# Altium PCB ButtonBoard.PcbDoc
Units mm, origin at the board's own origin, x right, y up, seen from the top; angles counter-clockwise.
Board outline 76 x 18 mm, 2 copper layers (Top Layer, Bottom Layer); 21 components, 24 nets, 84 pads, 47 vias.
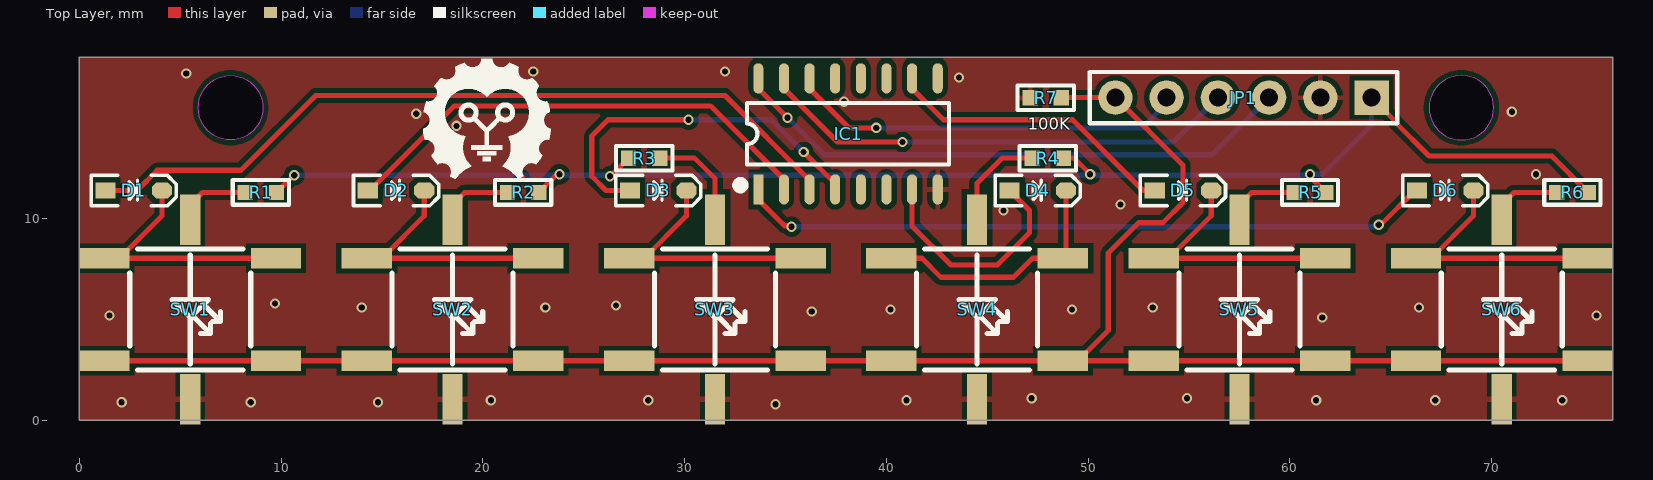
[diagram p0: Top Layer view]
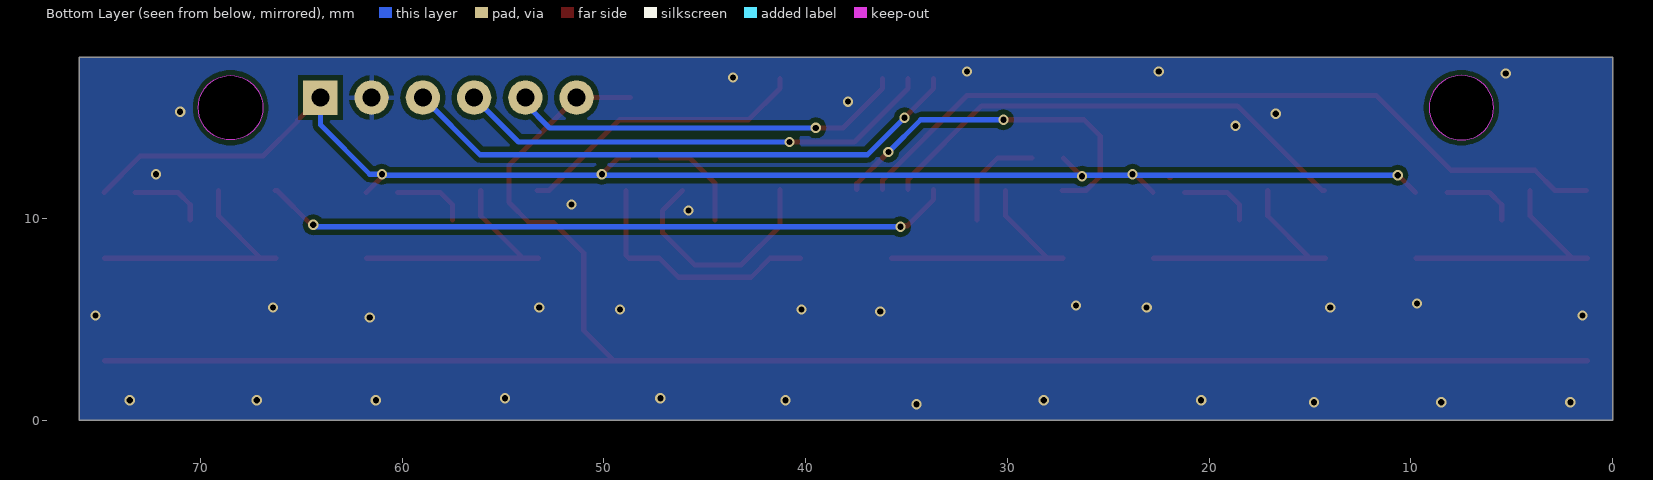
[diagram p1: Bottom Layer view, seen from below]

## Layer stack, top to bottom
Top Solder: solder mask 0.0102, Solder Resist, Dk 3.5
Top Layer: signal copper 0.0356
Dielectric 1: dielectric 0.32, FR-4, Dk 4.8
Bottom Layer: signal copper 0.0356
Bottom Solder: solder mask 0.0102, Solder Resist, Dk 3.5

## Board outline
0,0 76,0 76,18 0,18
cut-out: 66.9,15.5 ccw(c68.5,15.5) 68.5,13.9 ccw(c68.5,15.5) 70.1,15.5 ccw(c68.5,15.5) 68.5,17.1 ccw(c68.5,15.5)
cut-out: 7.5,13.9 cw(c7.5,15.5) 5.9,15.5 cw(c7.5,15.5) 7.5,17.1 cw(c7.5,15.5) 9.1,15.5 cw(c7.5,15.5)

## Design rules (kind name [scope] priority, off if disabled: settings)
Clearance [All] p1: gap=0.254 ignorepadtopadclearanceinfootprint=FALSE except(0: Arc-Hole Track-Hole SMDPad-Hole THPad-Hole Via-Hole Fill-Hole Poly-Hole Region-Hole Text-Hole)
PlaneConnect [All] p1: pad.planeconnectstyle=Relief pad.reliefexpansion=0.508 pad.reliefentries=4 pad.reliefconductorwidth=0.254 pad.reliefairgap=0.254 via.planeconnectstyle=Direct via.reliefexpansion=0.508 via.reliefentries=4 via.reliefconductorwidth=0.254 via.reliefairgap=0.254
PolygonConnect [All] p1: thpad.connectstyle=Relief thpad.reliefconductorwidth=0.254 thpad.reliefentries=4 thpad.polygonreliefangle="90 Angle" thpad.airgapwidth=0.254 smdpad.connectstyle=Relief smdpad.reliefconductorwidth=0.254 smdpad.reliefentries=4 smdpad.polygonreliefangle="90 Angle" smdpad.airgapwidth=0.254 via.connectstyle=Direct via.reliefconductorwidth=0.254 via.reliefentries=4 via.polygonreliefangle="90 Angle" via.airgapwidth=0.254
RoutingVias [All] p1: holewidth=0.305 width=0.508 viastyle="Through Hole" minholewidth=0.305 minwidth=0.508 maxholewidth=0.305 maxwidth=0.508
SolderMaskExpansion [All] p1: expansion=0.102
Width [All] p1: maxlimit=2.54 minlimit=0.152 preferedwidth=0.254
29 further rules are at their usual default settings.

## Components (designator, comment, footprint, x,y, rotation, side; value= is the part's Value field where it differs from the comment)
D1 "1N4148" SOD-323 2.7,11.4 r0 top
D2 "1N4148" SOD-323 15.7,11.4 r0 top
D3 "1N4148" SOD-323 28.7,11.4 r0 top
D4 "1N4148" SOD-323 47.5,11.4 r0 top
D5 "1N4148" SOD-323 54.7,11.4 r0 top
D6 "1N4148" SOD-323 67.7,11.4 r0 top
IC1 "CD4017" SOP16_L 38.1,14.2 r90 top
JP1 "HDR-1X6" HDR2.54-LI-6P 57.7,16 r180 top
R1 "22K" "R 0603_L" 9,11.3 r180 top
R2 "22K" "R 0603_L" 22,11.3 r180 top
R3 "22K" "R 0603_L" 28,13 r0 top
R4 "22K" "R 0603_L" 48,13 r180 top
R5 "22K" "R 0603_L" 61,11.3 r180 top
R6 "22K" "R 0603_L" 74,11.3 r180 top
R7 "100K" "R 0603_L" 47.9,16 r180 top
SW1 "PB6149L" FWDDKG-6*6*9.5 5.5,5.5 r270 top
SW2 "PB6149L" FWDDKG-6*6*9.5 18.5,5.5 r270 top
SW3 "PB6149L" FWDDKG-6*6*9.5 31.5,5.5 r270 top
SW4 "PB6149L" FWDDKG-6*6*9.5 44.5,5.5 r270 top
SW5 "PB6149L" FWDDKG-6*6*9.5 57.5,5.5 r270 top
SW6 "PB6149L" FWDDKG-6*6*9.5 70.5,5.5 r270 top

## Footprints (in the part's own frame and the unit in brackets; to place one, negate y for a bottom-side part, rotate by r counter-clockwise, add the part's x,y. Pads: shape width x height; smd on the part's side, far side on the other; paste and mask are expansions set on the pad)
FWDDKG-6*6*9.5 [mm] "6mm*6mm*9.5mm(长*宽*高)"
  rect 1x2.5 smd: 1(-2.54,4.25) 2(2.54,4.25) 3(-2.54,-4.25) 4(2.54,-4.25)
  rect 2.5x1 smd: L1(-4.445,0) L2(4.445,0)
  silkscreen extent -3,-3 3,3, body extent -5,-5 5,5, height 9.5
HDR2.54-LI-6P [mm] "排针，6脚"
  rect 1.7x1.7 hole 0.9: 1(-6.35,0)
  round 1.7 hole 0.9: 2(-3.81,0) 3(-1.27,0) 4(1.27,0) 5(3.81,0) 6(6.35,0)
  silkscreen extent -7.62,-1.27 7.62,1.27, body extent -7.62,-1.27 7.62,1.27, height 8.5
"R 0603_L" [mil] "1/10W贴片电阻"
  rect 30x30 smd: 1(-30.59,0) 2(30.59,0)
  silkscreen extent -55,-24 55,24, body extent -31,-16 32,16, height 16
SOD-323 [mm] "1.8x1.3X0.9mm（长宽高，不包括引脚）"
  rect 1x0.8 smd: 1(-1.4,0)
  oct 1x0.8 smd: 2(1.4,0)
  silkscreen extent -2.11,-0.76 2.11,0.76, body extent -1.34,-0.63 1.31,0.67, height 1
SOP16_L [mm] "10.3*6.2*1.8mm（长宽高）"
  rect 1.5x0.5 smd: 1(-2.752,4.445)
  oval 1.5x0.5 smd: 2(-2.752,3.175) 3(-2.752,1.905) 4(-2.752,0.635) 5(-2.752,-0.635) 6(-2.752,-1.905) 7(-2.752,-3.175) 8(-2.752,-4.445) 9(2.752,-4.445) 10(2.752,-3.175) 11(2.752,-1.905) 12(2.752,-0.635) 13(2.752,0.635) 14(2.752,1.905) 15(2.752,3.175) 16(2.752,4.445)
  silkscreen extent -2.69,-5 1.52,5.49, body extent -3,-5 3,5, height 1.9

## Part data
D1 D2 D3 D4 D5 D6: "高速开关二极管"
IC1: "10位计数器", BOM名称=6路反相器, 学习资源=www.ooocke.com, 版权归属=源创客
JP1: library part "Header 6", "6P接插件", BOM名称=6P接插件, 学习资源=www.ooocke.com, 版权归属=源创客
R1 R2 R3 R4 R5 R6 R7: library part R, "贴片电阻"
SW1 SW2 SW3 SW4 SW5 SW6: library part FWDDKK, "6*6复位带灯开关", BOM名称=6*6自锁带灯开关, 学习资源=www.ooocke.com, 版权归属=源创客

## Via types
v1: diameter 0.508, hole 0.305, Top Layer to Bottom Layer, 47 vias

## Nets (pads, with @x,y where several pads share a name; then routed paths per layer and width w, separated by ;. In a path a pad name is that pad's centre, name@x,y a point inside that pad or via, vN(x,y) a via of type N, cw(c..) or ccw(c..) an arc to the next point about the centre after c; other vN are vias at no path point)
+24: JP1.1 R1.1 R2.1 R3.1 R4.1 R5.1 R6.1 | length 75.3
  Top Layer w0.254: R1.1 v1@10.628,12.151 ; R2.1 23.628,12.151 23.751,12.151 v1(23.8,12.2) ; v1(26.3,12.1) 26.323,12.1 R3.1 ; R4.1 49.3,13 v1(50.1,12.2) ; v1(61,12.2) 61.049,12.151 61.049,12.028 R5.1 ; JP1.1 65.175,14.875 65.175,14.825 66.9,13.1 72.977,13.1 R6.1
  Bottom Layer w0.254: v1(10.655,12.151) 60.951,12.151 v1(61,12.2) 61.6,12.2 64.05,14.65 JP1.1
DATA: JP1.6 R7.1 SW1.2 SW1.4 SW2.2 SW2.4 SW3.2 SW3.4 SW4.2 SW4.4 SW5.2 SW5.4 SW6.2 SW6.4 | length 93.5
  Top Layer w0.254: SW1.4 SW1.2 SW2.4 SW2.2 SW3.4 SW3.2 SW4.4 SW4.2 SW4.2@49.5,2.96 ; R7.1 JP1.6 54.7,12.65 54.7,10.8 53.7,9.8 52.5,9.8 51,8.3 51,4.46 SW4.2@49.5,2.96 ; SW6.2 SW6.4 SW5.2 SW5.4 SW4.2@49.5,2.96
GND: IC1.8 JP1.2 R7.2 SW1.L2 SW2.L2 SW3.L2 SW4.L2 SW5.L2 SW6.L2
  other v1: 34.5,0.8 2.1,0.9 8.5,0.9 14.8,0.9 20.4,1 28.2,1 41,1 61.3,1 67.2,1 73.5,1 47.2,1.1 54.9,1.1 61.6,5.1 1.5,5.2 75.2,5.2 36.3,5.4 40.2,5.5 49.2,5.5 14,5.6 23.1,5.6 53.2,5.6 66.4,5.6 26.6,5.7 9.7,5.8 45.8,10.4 51.6,10.7 72.2,12.2 18.7,14.6 16.7,15.2 71,15.3 37.9,15.8 43.6,17 5.3,17.2 22.5,17.3 32,17.3
NetD1_1: D1.1 IC1.3 | length 39
  Top Layer w0.254: D1.1 2.861,11.4 3.861,12.4 8.022,12.4 11.722,16.1 32,16.1 36.195,11.905 IC1.3
NetD1_2: D1.2 SW1.1 SW1.3 | length 12.7
  Top Layer w0.254: SW1.3 SW1.3@2,8.04 ; D1.2 4.1,10.14 SW1.3@2,8.04 ; SW1.1 SW1.3@2,8.04
NetD2_1: D2.1 IC1.2 | length 24.4
  Top Layer w0.254: D2.1 14.4,11.4 18.592,15.592 31.281,15.592 34.925,11.948 IC1.2
NetD2_2: D2.2 SW2.1 SW2.3 | length 12.7
  Top Layer w0.254: SW2.3 SW2.3@15,8.04 ; D2.2 17.1,10.14 SW2.3@15,8.04 ; SW2.1 SW2.3@15,8.04
NetD3_1: D3.1 IC1.4 | length 18.2
  Top Layer w0.254: D3.1 26.1,11.4 25.4,12.1 25.4,14.1 26.2,14.9 v1(30.2,14.9) ; v1(35.9,13.3) 37.465,11.735 IC1.4
  Bottom Layer w0.254: v1(30.2,14.9) 34.3,14.9 v1(35.9,13.3)
NetD3_2: D3.2 SW3.1 SW3.3 | length 12.7
  Top Layer w0.254: SW3.3 SW3.3@28,8.04 ; D3.2 30.1,10.14 SW3.3@28,8.04 ; SW3.1 SW3.3@28,8.04
NetD4_1: D4.1 IC1.7 | length 11.6
  Top Layer w0.254: IC1.7 41.275,9.625 43.2,7.7 45.5,7.7 47.1,9.3 47.1,10.4 D4.1
NetD4_2: D4.2 SW4.1 SW4.3 | length 12.7
  Top Layer w0.254: SW4.3 41.76,8.04 42.7,7.1 46.3,7.1 47.24,8.04 SW4.1 48.9,8.19 D4.2
NetD5_1: D5.1 IC1.10 | length 14.6
  Top Layer w0.254: IC1.10 41.275,16.452 42.827,14.9 49.222,14.9 52.722,11.4 D5.1
NetD5_2: D5.2 SW5.1 SW5.3 | length 12.7
  Top Layer w0.254: SW5.3 SW5.3@54,8.04 ; D5.2 56.1,10.14 SW5.3@54,8.04 ; SW5.1 SW5.3@54,8.04
NetD6_1: D6.1 IC1.1 | length 34.4
  Top Layer w0.254: IC1.1 33.655,10.948 34.954,9.649 35.251,9.649 v1(35.3,9.6) ; v1(64.4,9.7) 64.5,9.7 66.2,11.4 D6.1
  Bottom Layer w0.254: v1(35.3,9.6) 64.3,9.6 v1(64.4,9.7)
NetD6_2: D6.2 SW6.1 SW6.3 | length 12.7
  Top Layer w0.254: SW6.3 SW6.3@67,8.04 ; D6.2 69.1,10.14 SW6.3@67,8.04 ; SW6.1 SW6.3@67,8.04
NetIC1_14: IC1.14 JP1.5 | length 19.8
  Top Layer w0.254: IC1.14 36.195,16.452 38.147,14.5 v1(39.5,14.5)
  Bottom Layer w0.254: v1(39.5,14.5) 52.69,14.5 53.89,15.7 JP1.5
NetIC1_15: IC1.15 JP1.4 | length 24
  Top Layer w0.254: IC1.15 34.925,16.452 37.577,13.8 v1(40.8,13.8)
  Bottom Layer w0.254: v1(40.8,13.8) 54.23,13.8 JP1.4
NetR1_2: R1.2 SW1.L1 | length 3.7
  Top Layer w0.254: SW1.L1 5.5,10.695 6.105,11.3 R1.2
NetR2_2: R2.2 SW2.L1 | length 3.7
  Top Layer w0.254: SW2.L1 18.5,10.695 19.105,11.3 R2.2
NetR3_2: R3.2 SW3.L1 | length 5.2
  Top Layer w0.254: R3.2 30.5,13 31.5,12 SW3.L1
NetR4_2: R4.2 SW4.L1 | length 5
  Top Layer w0.254: SW4.L1 44.5,11.766 45.734,13 R4.2@47.2,13
NetR5_2: R5.2 SW5.L1 | length 3.7
  Top Layer w0.254: SW5.L1 57.5,10.695 58.105,11.3 R5.2
NetR6_2: R6.2 SW6.L1 | length 3.7
  Top Layer w0.254: SW6.L1 70.5,10.695 71.105,11.3 R6.2
VCC: IC1.16 JP1.3 | length 28.4
  Top Layer w0.254: IC1.16 33.655,16.445 v1(35.1,15)
  Bottom Layer w0.254: v1(35.1,15) 36.935,13.165 56.135,13.165 JP1.3
pads on no net: IC1.5 IC1.6 IC1.9 IC1.11 IC1.12 IC1.13
copper on no net: | length 0
  Top Layer w0.254: 21.928,12.051 21.955,12.051

## Polygon pours and split planes (outlines as drawn)
GND on Bottom Layer "Top Layer-No Net" (solid, remove dead copper, pour order 0): 0,0 76,0 76,18 0,18
GND on Top Layer "GND_L01_P001" (solid, remove dead copper, pour order 1): 0,0 76,0 76,18 0,18

## Silkscreen, mask and mechanical layers (free items; w line width, h text height)
Top Overlay:
  drawing of 1389 lines, arcs and shapes, not listed
Mechanical 1:
  circle w0.254: c7.5,15.5 r1.6
  circle w0.254: c68.5,15.5 r1.6
  lines w0.254: 0,0 0,18 76,18 76,0 0,0